# Altium PCB EXP-10.PcbDoc
Units mm, origin at the board's own origin, x right, y up, seen from the top; angles counter-clockwise.
Board outline 152.4 x 136.53 mm, 2 copper layers (Top Layer, Bottom Layer); 66 components, 92 nets, 204 pads, 9 vias.
Unrouted connection lines stored in the file: 8.
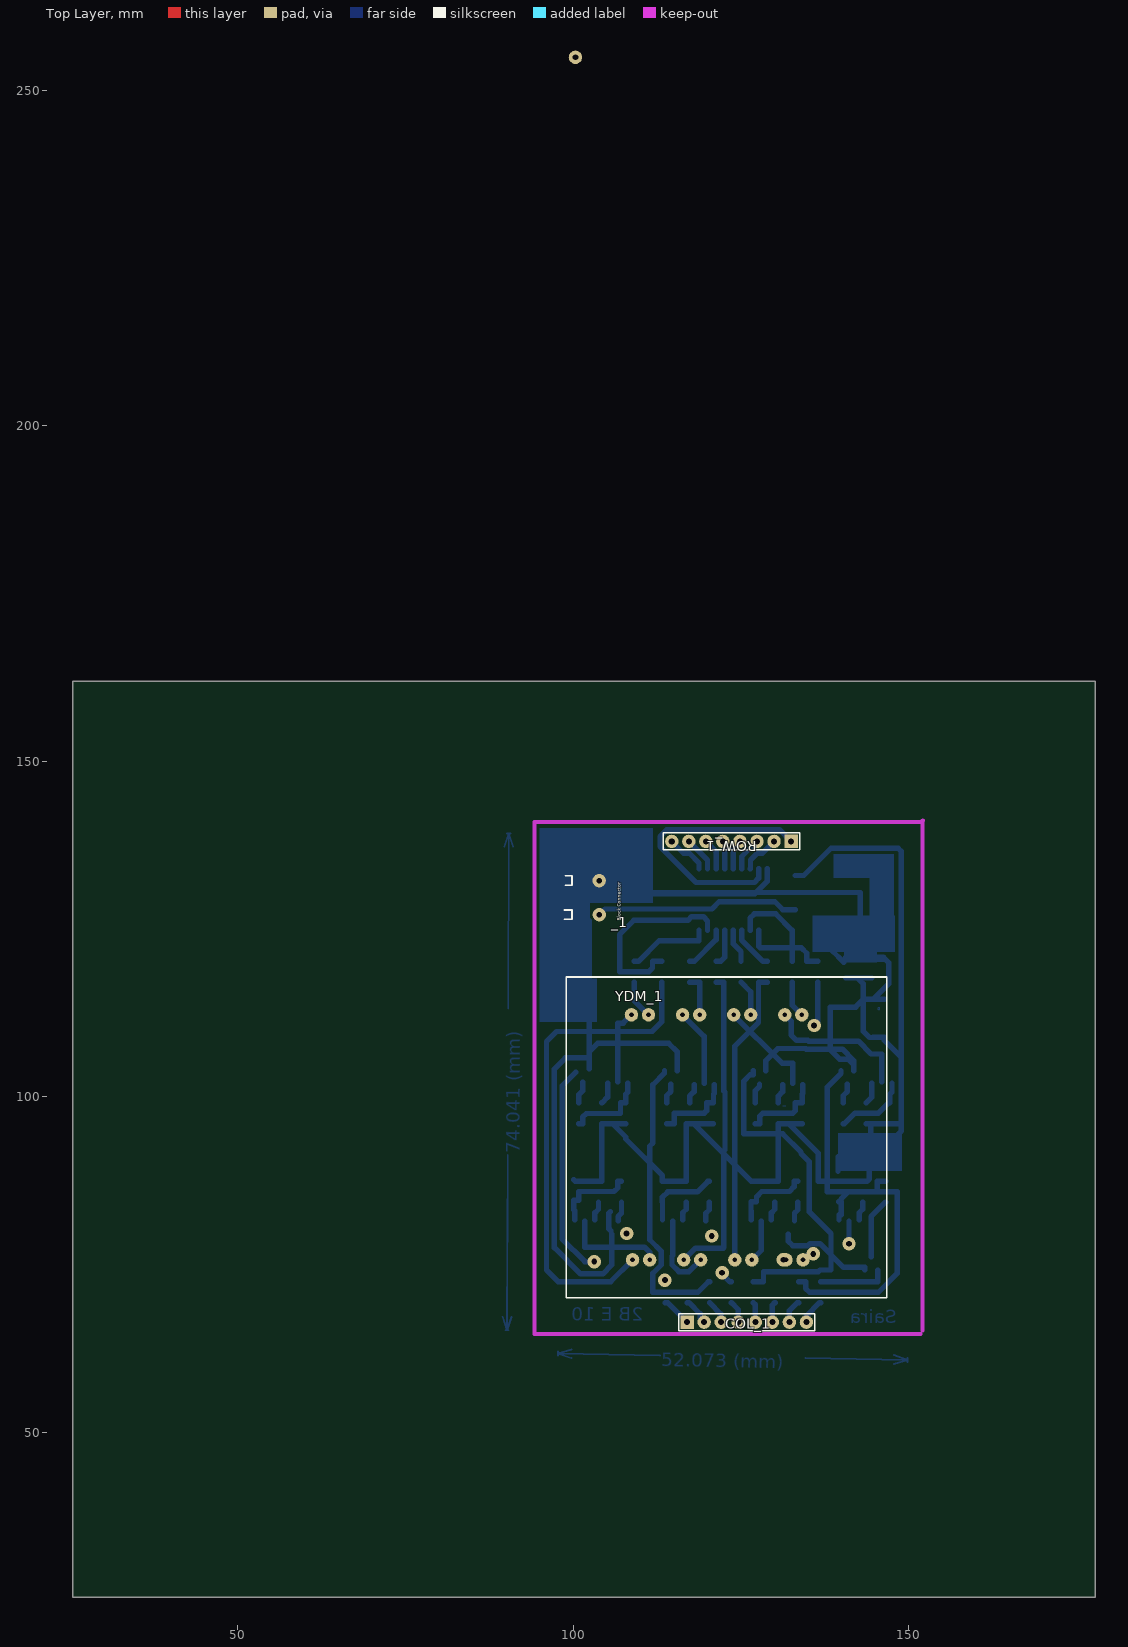
[diagram p0: Top Layer view]
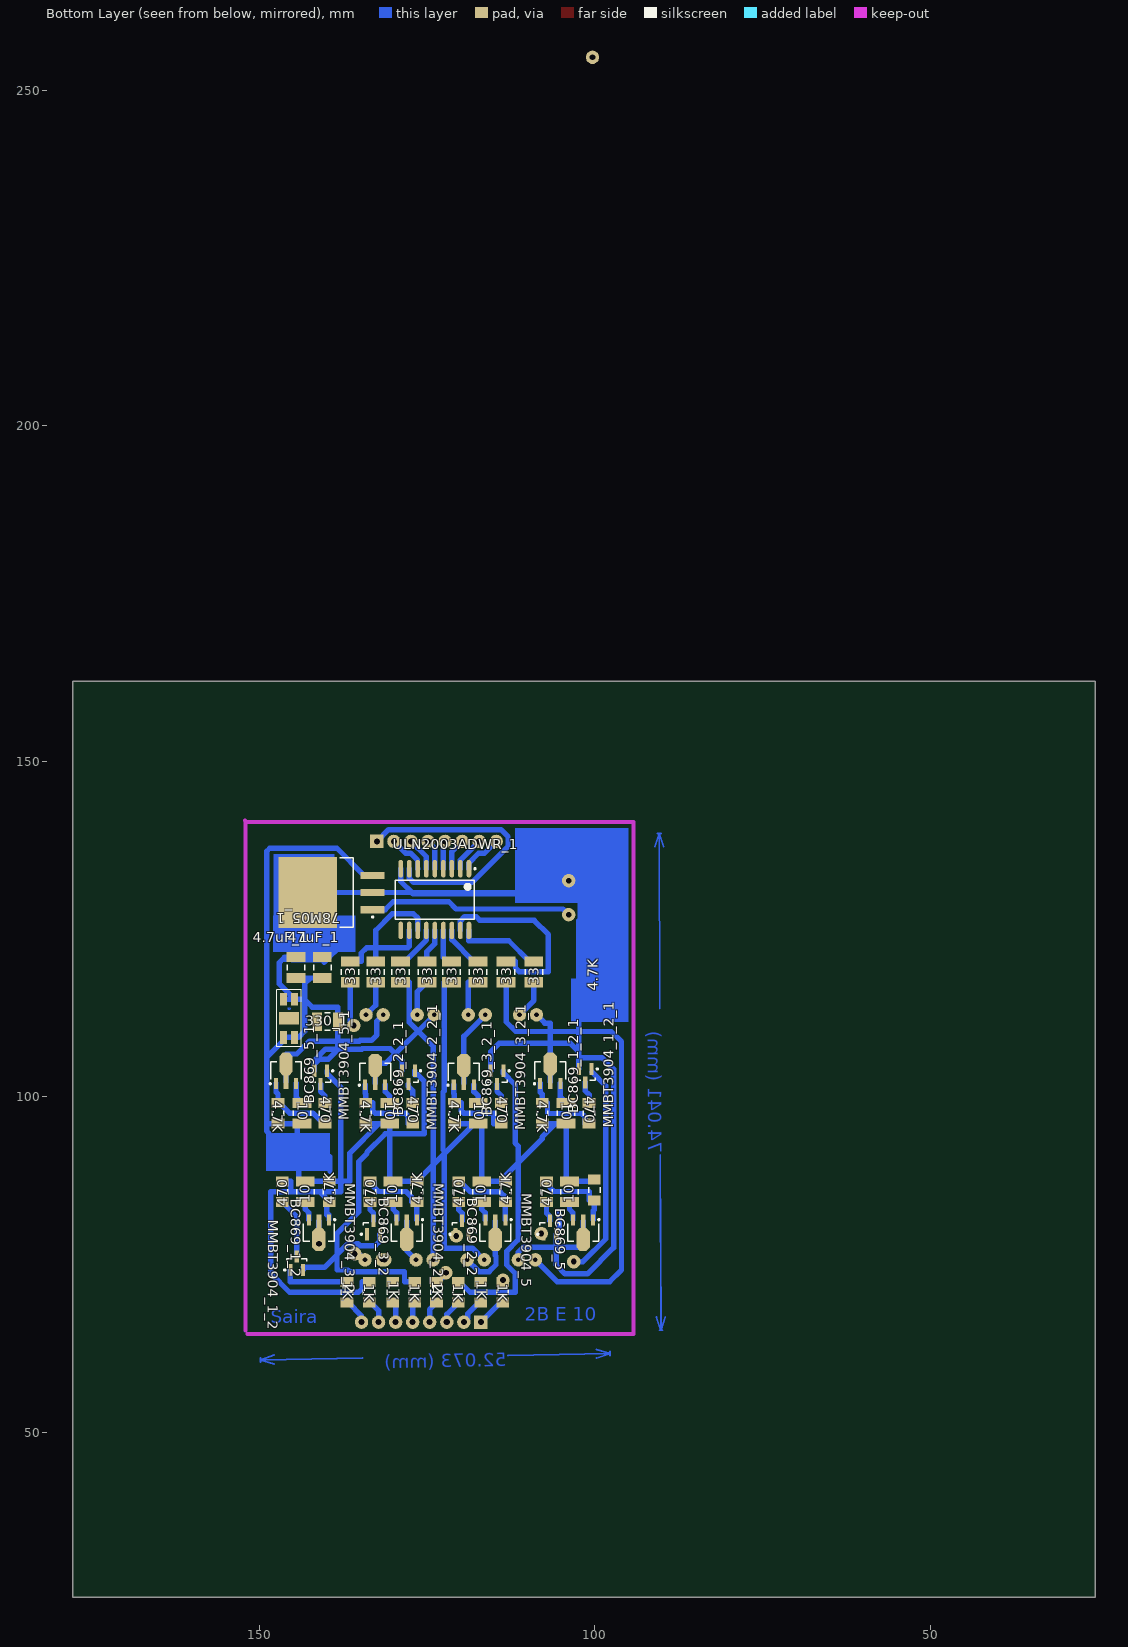
[diagram p1: Bottom Layer view, seen from below]

## Layer stack, top to bottom
Top Solder: solder mask 0.0102, Solder Resist, Dk 3.5
Top Layer: signal copper 0.0356
Dielectric 1: dielectric 0.32, FR-4, Dk 4.8
Bottom Layer: signal copper 0.0356
Bottom Solder: solder mask 0.0102, Solder Resist, Dk 3.5

## Board outline
25.4,25.4 177.8,25.4 177.8,161.925 25.4,161.925

## Design rules (kind name [scope] priority, off if disabled: settings)
Clearance [All] p1: gap=0.35 ignorepadtopadclearanceinfootprint=FALSE
ComponentClearance [All] p1 off: gap=0.254 collisioncheckmode=3 verticalgap=0.254 showdistances=FALSE
PlaneClearance [All] p1: clearance=0.85
PolygonConnect [All] p1: connectstyle=Direct reliefconductorwidth=0.254 reliefentries=4 polygonreliefangle="90 Angle" airgapwidth=0.254
RoutingVias [All] p1: holewidth=0.711 width=1.27 viastyle="Through Hole" minholewidth=0.711 minwidth=1.27 maxholewidth=0.711 maxwidth=1.27
SolderMaskExpansion [All] p1: expansion=0.102 istentingtop=FALSE
Width [All] p1: maxlimit=0.8 minlimit=0.8 preferedwidth=0.8
28 further rules are at their usual default settings.

## Components (designator, comment, footprint, x,y, rotation, side; value= is the part's Value field where it differs from the comment)
1K "Comment" RESC3216M 133.604,70.866 r270 bottom
1K "Comment" RESC3216M 113.713,70.866 r270 bottom
1K "Comment" RESC3216M 126.825,70.866 r270 bottom
1K "Comment" RESC3216M 120.317,70.866 r270 bottom
1K "Comment" RESC3216M 130.08,70.866 r270 bottom
1K "Comment" RESC3216M 123.571,70.866 r270 bottom
1K "Comment" RESC3216M 136.906,70.866 r270 bottom
1K "Comment" RESC3216M 116.967,70.866 r270 bottom
4.7K "Comment" RESC3216M 147.193,97.536 r270 bottom
4.7K "Comment" RESC3216M 107.823,97.536 r270 bottom
4.7K "Comment" RESC3216M 134.112,97.536 r270 bottom
4.7K "Comment" RESC3216M 120.904,97.536 r270 bottom
4.7K "Comment" RESC3216M 126.492,85.878 r90 bottom
4.7K "Comment" RESC3216M 113.284,85.878 r90 bottom
4.7K "Comment" RESC3216M 139.573,85.878 r90 bottom
4.7K "Comment" RESC3216M 100.055,86.106 r90 bottom
4.7uF_1 "Comment" CAPC3225M 144.526,119.253 r90 bottom
10 "Comment" RESC3225M 143.637,97.536 r270 bottom
10 "Comment" RESC3225M 104.267,97.536 r270 bottom
10 "Comment" RESC3225M 130.556,97.536 r270 bottom
10 "Comment" RESC3225M 117.348,97.536 r270 bottom
10 "Comment" RESC3225M 130.048,85.852 r90 bottom
10 "Comment" RESC3225M 116.84,85.852 r90 bottom
10 "Comment" RESC3225M 143.129,85.852 r90 bottom
10 "Comment" RESC3225M 103.759,85.852 r90 bottom
33 "Comment" RESC3225M 109.076,118.618 r90 bottom
33 "Comment" RESC3225M 113.23,118.618 r90 bottom
33 "Comment" RESC3225M 121.322,118.618 r90 bottom
33 "Comment" RESC3225M 117.385,118.618 r90 bottom
33 "Comment" RESC3225M 128.942,118.618 r90 bottom
33 "Comment" RESC3225M 125.005,118.618 r90 bottom
33 "Comment" RESC3225M 136.435,118.618 r90 bottom
33 "Comment" RESC3225M 132.625,118.618 r90 bottom
47uF_1 "Comment" CAPC3225M 140.589,119.253 r90 bottom
78M05_1 "Comment" TO254P1420-4M 139.198,130.429 r0 bottom
330_1 "Comment" RESC3225M 139.827,111.187 r180 bottom
470 "Comment" RESC3216M 140.208,97.536 r270 bottom
470 "Comment" RESC3216M 100.838,97.536 r270 bottom
470 "Comment" RESC3216M 127.127,97.536 r270 bottom
470 "Comment" RESC3216M 113.919,97.536 r270 bottom
470 "Comment" RESC3216M 133.477,85.852 r90 bottom
470 "Comment" RESC3216M 120.269,85.852 r90 bottom
470 "Comment" RESC3216M 146.558,85.852 r90 bottom
470 "Comment" RESC3216M 107.188,85.852 r90 bottom
_1 "Comment" "PCB Block Connector" 103.632,129.667 r90 top
BC869_1_2 "Comment" SOT89M 141.097,79.74 r270 bottom
BC869_1_2_1 "Comment" SOT89M 106.627,103.89 r90 bottom
BC869_2_2 "Comment" SOT89M 114.808,79.74 r270 bottom
BC869_2_2_1 "Comment" SOT89M 132.715,103.681 r90 bottom
BC869_3_2 "Comment" SOT89M 128.016,79.74 r270 bottom
BC869_3_2_1 "Comment" SOT89M 119.507,103.681 r90 bottom
BC869_5 "Comment" SOT89M 101.727,79.74 r270 bottom
BC869_5_1 "Comment" SOT89M 145.997,103.89 r90 bottom
COL_1 "Comment" HDR1X8 116.967,66.421 r0 top
MMBT3904_1_2 "Comment" SOT23-3M 144.399,75.184 r90 bottom
MMBT3904_1_2_1 "Comment" SOT23-3M 101.412,103.14 r270 bottom
MMBT3904_2_2 "Comment" SOT23-3M 119.761,80.518 r90 bottom
MMBT3904_2_2_1 "Comment" SOT23-3M 127.762,102.87 r270 bottom
MMBT3904_3_2 "Comment" SOT23-3M 132.969,80.518 r90 bottom
MMBT3904_3_2_1 "Comment" SOT23-3M 114.554,102.87 r270 bottom
MMBT3904_5 "Comment" SOT23-3M 106.68,80.518 r90 bottom
MMBT3904_5_1 "Comment" SOT23-3M 140.843,102.87 r270 bottom
ROW_1 "Comment" HDR1X8 132.461,138.049 r180 top
ULN2003ADWR_1 "Comment" SOIC127P1030-18M 123.825,129.385 r270 bottom
YDM_1 "Comment" "Yellow or Green Dot Matrix DIsplay" 122.725,93.954 r0 top net-tie
? "Comment" SMD-LED 145.542,111.695 r90 bottom

## Footprints (in the part's own frame and the unit in brackets; to place one, negate y for a bottom-side part, rotate by r counter-clockwise, add the part's x,y. Pads: shape width x height; smd on the part's side, far side on the other; paste and mask are expansions set on the pad)
CAPC3225M [mm] "Chip Capacitor, Body 3.2x2.5mm, IPC Low Density"
  rect 1.5x2.8 smd: 1(-1.55,0) 2(1.55,0)
  silkscreen extent -0.4,-1.3 0.4,1.3, body extent -1.7,-1.35 1.7,1.35, height 1.35
HDR1X8 [mm] "Connector; Header; 8 Position"
  rect 2x2 hole 0.9: 1(0,0)
  round 2 hole 0.9: 2(2.54,0) 3(5.08,0) 4(7.62,0) 5(10.16,0) 6(12.7,0) 7(15.24,0) 8(17.78,0)
  silkscreen extent -1.27,-1.27 19.05,1.27
"PCB Block Connector" [mm]
  round 2 hole 0.85: 1(-2.54,-0.254) 2(2.54,-0.24)
  silkscreen extent -3.22,3.82 3.26,4.96, body extent -5,-5.45 5.03,4.96, height 5.08
RESC3216M [mm] "Chip Resistor, Body 3.2x1.6mm, IPC Low Density"
  rect 1.5x1.9 smd: 1(-1.55,0) 2(1.55,0)
  silkscreen extent -0.4,-0.85 0.4,0.85, body extent -1.68,-0.87 1.68,0.87, height 0.71
RESC3225M [mm] "Chip Resistor, Body 3.2x2.5mm, IPC Low Density"
  rect 1.5x2.8 smd: 1(-1.55,0) 2(1.55,0)
  silkscreen extent -0.4,-1.3 0.4,1.3, body extent -1.68,-1.32 1.68,1.32, height 0.71
SMD-LED [mm] "SMD LED PCB"
  rect 1.9x1 smd: 1(-2.85,0.82) 2(-2.85,-0.82) 3(2.85,-0.82) 4(2.85,0.82)
  rect 1.8x3 smd: 5(0,0)
  Top Layer circle w0.154: c1.441,-0.01 r0.149
  silkscreen extent -4.25,-1.84 4.25,1.82
SOIC127P1030-18M [mm] "SOIC, 18-Leads, Body 11.6x7.5mm, Pitch 1.27mm, IPC Low Density"
  oval 2.6x0.7 smd: 1(-4.6,5.08) 2(-4.6,3.81) 3(-4.6,2.54) 4(-4.6,1.27) 5(-4.6,0) 6(-4.6,-1.27) 7(-4.6,-2.54) 8(-4.6,-3.81) 9(-4.6,-5.08) 10(4.6,-5.08) 11(4.6,-3.81) 12(4.6,-2.54) 13(4.6,-1.27) 14(4.6,0) 15(4.6,1.27) 16(4.6,2.54) 17(4.6,3.81) 18(4.6,5.08)
  silkscreen extent -4.72,-5.9 2.9,6.1, body extent -3.8,-5.95 3.8,5.95, height 2.65
SOT23-3M [mm] "SOT23, 3-Leads, Body 2.9x1.3mm, Pitch 0.95mm, Lead Span 2.5mm, IPC Low Density"
  rect 1.8x0.6 smd: b(-1,0.95) c(1,0) e(-1,-0.95)
  silkscreen extent -1.12,-1.5 0.7,1.93, body extent -0.7,-1.5 0.7,1.5, height 1.1
SOT89M [mm] "SOT89, 3-Leads, Body 4.5x2.4 mm, Pitch 1.5mm, Lead Span 4.1mm, IPC Low Density"
  rect 1.6x0.6 smd: b(-1.9,1.5) e(-1.9,-1.5)
  rect 2x0.7 smd: c(-1.7,0)
  oct 3.4x2 smd: c(1,0)
  silkscreen extent -2.07,-2.3 1.3,2.47, body extent -1.3,-2.3 1.3,2.3, height 1.6
TO254P1420-4M [mm] "D2-PAK, 4-Leads, Body 8.9x10.1mm, Pitch 2.54mm, Lead Span 14.2mm, IPC Low Density"
  rect 8.7x10.55 smd: C(3.55,0)
  rect 3.6x1.1 smd: GND(-6.1,0) input(-6.1,2.54) OUT(-6.1,-2.54)
  silkscreen extent -6.22,-5.2 -1.2,5.2, body extent -3.25,-5.2 6.15,5.2, height 4.65
"Yellow or Green Dot Matrix DIsplay" [mm] "Y or G Dot Matrix"
  round 2 hole 0.7: 3(-13.886,-18.262) 4(-11.346,-18.262) 6(-6.266,-18.262) 7(-3.726,-18.262) 9(1.354,-18.262) 10(3.894,-18.262) 12(8.974,-18.262) 13(11.514,-18.262) 20(11.346,18.262) 21(8.806,18.262) 23(3.726,18.262) 24(1.186,18.262) 26(-3.894,18.262) 27(-6.434,18.262) 29(-11.514,18.262) 30(-14.054,18.262)
  silkscreen extent -23.78,-23.9 23.99,23.89

## Free pads (board coordinates)
  round 2 hole 0.85: 2(100.33,254.889)

## Via types
v1: diameter 2, hole 0.85, Top Layer to Bottom Layer, 9 vias

## Nets (pads, with @x,y where several pads share a name; then routed paths per layer and width w, separated by ;. In a path a pad name is that pad's centre, name@x,y a point inside that pad or via, vN(x,y) a via of type N, cw(c..) or ccw(c..) an arc to the next point about the centre after c; other vN are vias at no path point)
1: 33.1@113.231,117.068 YDM_1.3 | length 73.3
  Bottom Layer w0.8: YDM_1.3 105.588,72.441 97.757,72.441 96.012,74.186 96.012,108.204 97.536,109.728 111.76,109.728 113.182,111.15 113.182,117.068 33.1@113.231,117.068
2: BC869_5.c YDM_1.4 | length 15
  Bottom Layer w0.8: BC869_5.c@101.727,81.44 101.727,78.74 101.727,77.597 110.617,77.597 111.379,76.835 YDM_1.4
3: 33.1@121.322,117.068 YDM_1.6 | length 47.5
  Bottom Layer w0.8: YDM_1.6 118.212,77.445 122.326,77.445 122.428,77.546 122.428,91.948 122.606,92.126 122.606,100.686 122.403,100.889 122.403,117.068 33.1@121.322,117.068
4: BC869_2_2.c YDM_1.7 | length 12
  Bottom Layer w0.8: BC869_2_2.c@114.808,81.44 114.808,78.74 114.808,76.375 114.709,76.276 114.709,74.967 115.734,73.942 117.249,73.942 YDM_1.7
5: 33.1@128.942,117.068 YDM_1.9 | length 44.2
  Bottom Layer w0.8: YDM_1.9 124.079,107.544 127.61,111.074 127.61,117.068 33.1@128.942,117.068
6: BC869_3_2.c YDM_1.10 | length 6.3
  Bottom Layer w0.8: YDM_1.10 128.016,77.089 128.016,78.74 BC869_3_2.c@128.016,81.44
7: 33.1@136.435,117.068 YDM_1.12 | length 6.7
  Bottom Layer w0.8: v1(135.89,110.617) 136.435,111.162 33.1@136.435,117.068
  other v1: 131.318,75.692
8: BC869_1_2.c YDM_1.13 | length 5.2
  Bottom Layer w0.8: YDM_1.13 135.128,76.581 v1(135.763,76.581) ; v1(141.097,78.105) 141.097,78.74 BC869_1_2.c@141.097,81.44
9: 33.1@132.625,117.068 YDM_1.20 | length 5.5
  Bottom Layer w0.8: 33.1@132.625,117.068 132.625,113.663 YDM_1.20
10: BC869_5_1.c YDM_1.21 | length 22.3
  Bottom Layer w0.8: YDM_1.21 132.461,111.287 132.461,109.22 133.274,108.407 134.95,108.407 135.077,108.28 142.494,108.28 144.399,106.375 145.997,106.375 145.997,104.89 BC869_5_1.c@145.997,102.19
11: 33.1@125.005,117.068 YDM_1.23 | length 5.5
  Bottom Layer w0.8: 33.1@125.005,117.068 126.452,115.621 YDM_1.23
12: BC869_2_2_1.c YDM_1.24 | length 14.8
  Bottom Layer w0.8: YDM_1.24 131.124,105.004 132.715,105.004 132.715,104.681 BC869_2_2_1.c@132.715,101.981
13: 33.1@117.385,117.068 YDM_1.26 | length 6.3
  Bottom Layer w0.8: 33.1@117.385,117.068 118.832,117.068 YDM_1.26
14: BC869_3_2_1.c YDM_1.27 | length 11.6
  Bottom Layer w0.8: YDM_1.27 119.507,109.001 119.507,104.681 BC869_3_2_1.c@119.507,101.981
15: 33.1@109.076,117.068 YDM_1.29 | length 5.7
  Bottom Layer w0.8: 33.1@109.076,117.068 109.076,114.352 YDM_1.29
16: BC869_1_2_1.c YDM_1.30 | length 11.3
  Bottom Layer w0.8: BC869_1_2_1.c@106.627,102.19 106.627,104.89 106.627,110.973 107.429,110.973 YDM_1.30
_1: 33.2@113.231,120.168 ULN2003ADWR_1.17 | length 29
  Bottom Layer w0.8: 33.2@113.231,120.168 111.811,120.168 111.811,119.202 111.227,118.618 106.909,118.618 106.909,124.181 109.017,126.289 117.107,126.289 117.653,126.835 119.38,126.835 120.015,126.2 ULN2003ADWR_1.17
_3: 33.2@121.322,120.168 ULN2003ADWR_1.15 | length 5.5
  Bottom Layer w0.8: 33.2@121.322,120.168 121.972,120.168 122.555,120.751 ULN2003ADWR_1.15
_5: 33.2@128.942,120.168 ULN2003ADWR_1.13 | length 6.6
  Bottom Layer w0.8: ULN2003ADWR_1.13 125.095,123.365 128.292,120.168 33.2@128.942,120.168
_7: 33.2@136.435,120.168 ULN2003ADWR_1.11 | length 12.8
  Bottom Layer w0.8: ULN2003ADWR_1.11 127.635,122.451 127.887,122.199 133.985,122.199 134.798,121.387 134.798,120.168 33.2@136.435,120.168
_9: 33.2@132.625,120.168 ULN2003ADWR_1.12 | length 14
  Bottom Layer w0.8: ULN2003ADWR_1.12 126.365,126.619 127,127.254 130.175,127.254 132.625,124.804 33.2@132.625,120.168
_11: 33.2@125.005,120.168 ULN2003ADWR_1.14 | length 5.1
  Bottom Layer w0.8: ULN2003ADWR_1.14 123.825,122.812 125.005,121.632 33.2@125.005,120.168
_13: 33.2@117.385,120.168 ULN2003ADWR_1.16 | length 6.6
  Bottom Layer w0.8: 33.2@117.385,120.168 118.035,120.168 121.285,123.418 ULN2003ADWR_1.16
_15: 33.2@109.076,120.168 ULN2003ADWR_1.18 | length 12.5
  Bottom Layer w0.8: 33.2@109.076,120.168 109.726,120.168 112.808,123.25 118.745,123.25 ULN2003ADWR_1.18
D1: ROW_1.7 ULN2003ADWR_1.2 | length 5.2
  Bottom Layer w0.8: ROW_1.7 120.015,135.255 ULN2003ADWR_1.2
D2: 1K.2@116.967,69.316 COL_1.2 | length 4.1
  Bottom Layer w0.8: 1K.2@116.967,69.316 117.254,69.316 118.929,67.641 118.929,66.999 COL_1.2
D3: ROW_1.5 ULN2003ADWR_1.4 | length 4.2
  Bottom Layer w0.8: ROW_1.5 122.555,137.795 ULN2003ADWR_1.4
D4: 1K.2@123.571,69.316 COL_1.4 | length 3.3
  Bottom Layer w0.8: 1K.2@123.571,69.316 124.587,68.3 COL_1.4
D5: ROW_1.3 ULN2003ADWR_1.6 | length 5
  Bottom Layer w0.8: ULN2003ADWR_1.6 125.095,135.763 ROW_1.3
D6: 1K.2@130.079,69.316 COL_1.6 | length 3.1
  Bottom Layer w0.8: COL_1.6 129.667,68.966 130.017,69.316 1K.2@130.079,69.316
D7: ROW_1.1 ULN2003ADWR_1.8 | length 40.8
  Bottom Layer w0.8: ULN2003ADWR_1.8 127.635,132.57 127,131.935 118.289,131.935 112.931,137.293 112.931,138.774 113.956,139.799 130.711,139.799 ROW_1.1
D8: 1K.2@136.906,69.316 COL_1.8 | length 3.9
  Bottom Layer w0.8: COL_1.8 134.747,67.357 136.706,69.316 1K.2@136.906,69.316
D9: ROW_1.2 ULN2003ADWR_1.7 | length 6
  Bottom Layer w0.8: ULN2003ADWR_1.7 126.415,134.035 126.415,135.271 127.443,136.299 128.171,136.299 ROW_1.2
D10: 1K.2@133.604,69.316 COL_1.7 | length 3.6
  Bottom Layer w0.8: COL_1.7 132.207,68.119 133.404,69.316 1K.2@133.604,69.316
D11: ROW_1.4 ULN2003ADWR_1.5 | length 4.5
  Bottom Layer w0.8: ULN2003ADWR_1.5 123.825,137.033 ROW_1.4
D12: 1K.2@126.825,69.316 COL_1.5 | length 3
  Bottom Layer w0.8: 1K.2@126.825,69.316 127.127,69.014 COL_1.5
D13: ROW_1.6 ULN2003ADWR_1.3 | length 4.7
  Bottom Layer w0.8: ROW_1.6 121.285,136.525 ULN2003ADWR_1.3
D14: 1K.2@120.317,69.316 COL_1.3 | length 3.6
  Bottom Layer w0.8: 1K.2@120.317,69.316 122.047,67.586 COL_1.3
D15: ROW_1.8 ULN2003ADWR_1.1 | length 6.2
  Bottom Layer w0.8: ROW_1.8 116.443,136.287 117.293,136.287 118.745,134.835 ULN2003ADWR_1.1
D16: 1K.2@113.713,69.316 COL_1.1 | length 4.5
  Bottom Layer w0.8: 1K.2@113.713,69.316 114.072,69.316 COL_1.1
GND: 4.7uF_1.2 47uF_1.2 78M05_1.C 78M05_1.GND 330_1.2 ?.3 ?.4 _1.2 MMBT3904_1_2.e MMBT3904_1_2_1.e MMBT3904_2_2.e MMBT3904_2_2_1.e MMBT3904_3_2.e MMBT3904_3_2_1.e MMBT3904_5.e MMBT3904_5_1.e ULN2003ADWR_1.9 | length 256.5
  Bottom Layer w0.8: 96.52,128.905 99.822,132.207 _1.2 ; MMBT3904_1_2_1.e 102.362,105.791 ; 105.554,82.887 105.303,82.635 105.303,80.345 MMBT3904_5.e@105.63,80.018 ; MMBT3904_5.e 105.73,74.93 104.409,73.609 101.092,73.609 97.18,77.521 97.18,104.14 98.831,105.791 102.362,105.791 ; MMBT3904_3_2_1.e 115.504,106.68 114.234,107.95 103.632,107.95 102.362,106.68 ; MMBT3904_2_2_1.e 128.712,105.41 130.49,107.188 134.62,107.188 134.722,107.086 138.277,107.086 ; ULN2003ADWR_1.9 128.905,132.08 127.254,130.429 ; MMBT3904_3_2.e 132.019,78.496 132.715,77.8 134.976,77.8 135.28,78.105 136.754,78.105 140.284,74.574 143.449,74.574 MMBT3904_1_2.e ; 140.335,120.015 139.743,120.607 139.743,120.635 139.589,120.789 139.561,120.789 138.303,122.047 ; 47uF_1.2 142.748,120.803 ; MMBT3904_5_1.e 141.793,104.79 ; ?.4 146.362,114.529 144.722,114.529 ?.3 ?.3@144.722,114.554 ; 102.362,105.791 102.362,106.68 ; 102.362,106.68 102.362,126.263 102.133,126.492 102.133,130.468 _1.2 ; _1.2 105.65,130.429 ; 105.65,130.429 127.254,130.429 ; 105.65,130.429 105.853,130.226 127.051,130.226 127.254,130.429 ; 127.254,130.429 78M05_1.GND 78M05_1.C 142.748,120.803 ; 138.277,107.086 330_1.2 138.277,113.36 142.088,113.36 143.281,114.554 ?.3@144.722,114.554 ; 138.277,107.086 138.277,107.036 139.7,105.613 140.97,105.613 141.793,104.79 ; 138.277,107.086 140.117,107.086 141.793,105.41 141.793,104.79 ; 138.303,122.047 137.179,123.171 137.179,123.717 137.922,124.46 138.201,124.46 138.303,124.358 138.303,122.047 ; 142.748,120.803 4.7uF_1.2 ; 4.7uF_1.2 144.812,120.517 146.487,120.517 ; 4.7uF_1.2 146.202,120.803 146.487,120.517 ; ?.3@144.722,114.554 146.99,116.822 146.99,120.015 146.487,120.517
Input: 78M05_1.input _1.1 | length 30.5
  Bottom Layer w0.8: _1.1 104.744,127.985 120.67,127.985 121.742,129.057 130.048,129.057 131.216,127.889 78M05_1.input
LED_R: 
N2b: 1K.1@116.967,72.416 MMBT3904_5.b
  other v1: 107.95,79.629
N2c: 470.1@107.188,84.302 MMBT3904_5.c | length 3
  Bottom Layer w0.8: MMBT3904_5.c 106.68,82.161 107.188,82.669 470.1@107.188,84.302
N2e: 
N4b: 1K.1@123.571,72.416 MMBT3904_2_2.b | length 2.1
  Bottom Layer w0.8: v1(122.174,73.787) 122.174,73.613 123.371,72.416 1K.1@123.571,72.416
  other v1: 120.65,79.248
N4c: 470.1@120.269,84.302 MMBT3904_2_2.c | length 3
  Bottom Layer w0.8: MMBT3904_2_2.c 119.761,82.652 120.269,83.16 470.1@120.269,84.302
N4e: 
N6b: 1K.1@130.079,72.416 MMBT3904_3_2.b
N6c: 470.1@133.477,84.302 MMBT3904_3_2.c | length 3
  Bottom Layer w0.8: MMBT3904_3_2.c 132.969,82.652 133.477,83.16 470.1@133.477,84.302
N6e: 
N8b: 1K.1@136.906,72.416 MMBT3904_1_2.b | length 10.2
  Bottom Layer w0.8: 1K.1@136.906,72.416 145.349,72.416 MMBT3904_1_2.b
N8c: 470.1@146.558,84.302 MMBT3904_1_2.c | length 9
  Bottom Layer w0.8: MMBT3904_1_2.c 144.399,82.143 470.1@146.558,84.302
N8e: 
N10b: 1K.1@133.604,72.416 MMBT3904_5_1.b | length 58.4
  Bottom Layer w0.8: 1K.1@133.604,72.416 134.62,72.416 134.62,71.45 135.204,70.866 145.466,70.866 148.26,73.66 148.26,85.827 141.097,85.827 141.072,85.852 137.871,85.852 137.871,101.458 139.893,103.48 MMBT3904_5_1.b
N10c: 470.1@140.208,99.086 MMBT3904_5_1.c | length 3
  Bottom Layer w0.8: 470.1@140.208,99.086 140.208,100.152 140.843,100.787 MMBT3904_5_1.c
N10e: 
N12b: 1K.1@126.825,72.416 MMBT3904_2_2_1.b | length 52.5
  Bottom Layer w0.8: MMBT3904_2_2_1.b 126.812,103.276 126.365,103.276 125.425,102.337 125.425,94.463 131.216,94.463 133.935,91.744 133.935,91.54 135.179,90.297 135.179,82.829 138.405,79.604 138.405,74.193 136.779,74.193 136.525,73.939 128.346,73.939 128.346,72.416 1K.1@126.825,72.416
N12c: 470.1@127.127,99.086 MMBT3904_2_2_1.c | length 3
  Bottom Layer w0.8: 470.1@127.127,99.086 127.127,100.901 127.762,101.536 MMBT3904_2_2_1.c
N12e: 
N14b: 1K.1@120.317,72.416 MMBT3904_3_2_1.b | length 44.3
  Bottom Layer w0.8: MMBT3904_3_2_1.b 113.604,103.53 111.862,101.788 111.862,93.116 111.404,92.659 111.404,78.689 113.129,76.965 113.129,74.967 111.862,73.7 111.862,70.866 118.567,70.866 120.117,72.416 1K.1@120.317,72.416
N14c: 470.1@113.919,99.086 MMBT3904_3_2_1.c | length 3
  Bottom Layer w0.8: 470.1@113.919,99.086 113.919,100.152 114.554,100.787 MMBT3904_3_2_1.c
N14e: 
N16b: 1K.1@113.713,72.416 MMBT3904_1_2_1.b | length 32.4
  Bottom Layer w0.8: MMBT3904_1_2_1.b@100.362,103.64 98.355,101.633 98.355,78.824 101.741,75.438 v1(103.124,75.438) ; v1(113.665,72.688) 113.665,72.604 113.477,72.416 1K.1@113.713,72.416
N16c: 470.1@100.838,99.086 MMBT3904_1_2_1.c | length 3.3
  Bottom Layer w0.8: 470.1@100.838,99.086 100.838,100.305 101.412,100.879 MMBT3904_1_2_1.c
N16e: 
P2b: 4.7K.1@100.055,84.556 470.2@107.188,87.402 BC869_5.b | length 12.6
  Bottom Layer w0.8: BC869_5.b 100.227,83.007 100.055,83.179 100.055,84.556 100.838,84.556 100.838,85.877 106.07,85.877 106.638,86.445 106.638,87.402 470.2@107.188,87.402
P2c: 
P2e: 10.1@103.759,84.302 BC869_5.e | length 2.9
  Bottom Layer w0.8: BC869_5.e 103.227,82.702 103.759,83.234 10.1@103.759,84.302
P4b: 4.7K.1@113.284,84.328 470.2@120.269,87.402 BC869_2_2.b | length 12.1
  Bottom Layer w0.8: 4.7K.1@113.284,84.328 113.284,85.014 4.7K.1@113.308,85.038 ; BC869_2_2.b 113.308,84.328 4.7K.1@113.308,85.038 ; 470.2@120.269,87.402 120.066,87.402 118.49,85.827 114.097,85.827 4.7K.1@113.308,85.038
P4c: 
P4e: 10.1@116.84,84.302 BC869_2_2.e | length 2.9
  Bottom Layer w0.8: BC869_2_2.e 116.308,82.702 116.84,83.234 10.1@116.84,84.302
P6b: 4.7K.1@126.492,84.328 470.2@133.477,87.402 BC869_3_2.b | length 11.9
  Bottom Layer w0.8: BC869_3_2.b 126.516,82.956 126.492,82.98 126.492,84.328 127.305,84.328 127.305,85.09 128.092,85.877 132.207,85.877 132.927,86.597 132.927,87.402 470.2@133.477,87.402
P6c: 
P6e: 10.1@130.048,84.302 BC869_3_2.e | length 2.9
  Bottom Layer w0.8: BC869_3_2.e 129.516,82.702 130.048,83.234 10.1@130.048,84.302
P8b: 4.7K.1@139.573,84.328 470.2@146.558,87.402 BC869_1_2.b | length 12.4
  Bottom Layer w0.8: 4.7K.1@139.573,84.328 4.7K.1@139.903,84.328 ; BC869_1_2.b 139.597,82.43 139.911,82.43 139.911,84.328 4.7K.1@139.903,84.328 ; 470.2@146.558,87.402 145.288,87.402 145.288,85.827 140.97,85.827 139.903,84.76 4.7K.1@139.903,84.328
P8c: 
P8e: 10.1@143.129,84.302 BC869_1_2.e | length 2.9
  Bottom Layer w0.8: BC869_1_2.e 142.597,82.702 143.129,83.234 10.1@143.129,84.302
P10b: 4.7K.1@147.193,99.086 470.2@140.208,95.986 BC869_5_1.b | length 11.3
  Bottom Layer w0.8: 470.2@140.208,95.986 140.411,95.986 141.987,97.561 145.465,97.561 146.99,99.086 147.193,99.086 147.193,100.381 147.497,100.685 BC869_5_1.b
P10c: 
P10e: 10.1@143.637,99.086 BC869_5_1.e | length 3.3
  Bottom Layer w0.8: 10.1@143.637,99.086 144.497,99.946 BC869_5_1.e
P12b: 4.7K.1@134.112,99.086 470.2@127.127,95.986 BC869_2_2_1.b | length 12.4
  Bottom Layer w0.8: 470.2@127.127,95.986 127.819,95.986 127.819,97.136 128.245,97.561 132.715,97.561 133.096,97.942 133.096,99.086 134.112,99.086 134.112,100.381 134.215,100.484 BC869_2_2_1.b
P12c: 
P12e: 10.1@130.556,99.086 BC869_2_2_1.e | length 3
  Bottom Layer w0.8: 10.1@130.556,99.086 130.556,100.101 131.215,100.76 BC869_2_2_1.e
P14b: 4.7K.1@120.904,99.086 470.2@113.919,95.986 BC869_3_2_1.b | length 12.6
  Bottom Layer w0.8: 470.2@113.919,95.986 115.037,95.986 115.037,97.561 119.507,97.561 119.888,97.942 119.888,99.086 120.904,99.086 120.904,100.381 121.007,100.484 BC869_3_2_1.b
P14c: 
P14e: 10.1@117.348,99.086 BC869_3_2_1.e | length 3
  Bottom Layer w0.8: 10.1@117.348,99.086 117.348,100.101 118.007,100.76 BC869_3_2_1.e
P16b: 4.7K.1@107.823,99.086 470.2@100.838,95.986 BC869_1_2_1.b | length 12.8
  Bottom Layer w0.8: 470.2@100.838,95.986 101.397,95.986 101.397,96.952 101.956,97.511 107.036,97.511 107.036,99.086 107.823,99.086 107.823,100.381 108.127,100.685 BC869_1_2_1.b
P16c: 
P16e: 10.1@104.267,99.086 BC869_1_2_1.e | length 3.3
  Bottom Layer w0.8: 10.1@104.267,99.086 105.127,99.946 BC869_1_2_1.e
VCC: 4.7K.2 4.7uF_1.1 10.2 47uF_1.1 78M05_1.OUT ?.1 ?.2 | length 198.8
  Bottom Layer w0.8: 4.7K.2@100.055,87.656 100.309,87.402 103.759,87.402 104.267,87.402 104.267,95.986 105.817,95.986 ; 4.7K.2@107.823,95.986 105.817,95.986 ; 4.7K.2@120.904,95.986 10.2@117.934,95.986 ; 78M05_1.OUT 134.348,132.969 138.412,137.033 148.424,137.033 148.893,136.564 148.893,105.863 ; 4.7K.2@134.112,95.986 132.106,95.986 ; 139.446,88.9 139.446,91.059 142.57,91.059 144.348,92.837 10.2@144.348,95.986 ; 4.7K.2@139.573,87.428 143.103,87.428 10.2@143.129,87.402 ; 47uF_1.1 142.24,117.703 142.342,117.703 ; 10.2@143.637,95.986 10.2@144.348,95.986 ; 4.7uF_1.1 142.342,117.703 ; 105.817,95.986 107.823,93.98 107.823,93.726 113.284,88.265 113.284,87.428 113.31,87.402 116.84,87.402 116.84,95.986 117.348,95.986 10.2@117.934,95.986 ; 10.2@117.934,95.986 126.492,87.428 128.245,87.428 128.271,87.402 130.048,87.402 130.556,87.402 130.556,95.986 132.106,95.986 ; 132.106,95.986 136.525,91.567 136.525,87.402 10.2@143.129,87.402 ; 142.342,117.703 143.205,116.84 143.205,109.779 144.145,108.839 144.722,108.839 ?.2 ?.1 146.362,108.394 148.893,105.863 ; 10.2@143.129,87.402 143.779,87.402 144.129,87.752 144.129,90.162 148.893,94.926 148.893,95.986 ; 10.2@144.348,95.986 147.193,95.986 148.893,95.986 ; 148.893,95.986 148.893,105.863
pads on no net: 330_1.1 ?.5 ULN2003ADWR_1.10
copper on no net: | length 101.7
  Bottom Layer w0.254: 89.474,67.201 90.133,65.198 ; 89.714,137.242 90.387,139.239 ; 89.879,65.199 90.387,65.198 ; 90.133,139.24 90.641,139.239 ; 90.223,91.335 90.133,65.198 ; 90.298,113.103 90.387,139.239 ; 90.807,67.196 90.133,65.198 ; 91.047,137.237 90.387,139.239
  Bottom Layer w0.3: 97.714,61.441 97.725,62.041 ; 99.707,61.038 97.72,61.741 ; 99.731,62.371 97.72,61.741 ; 112.903,61.468 97.72,61.741 ; 134.601,61.078 149.785,60.806 ; 147.773,60.175 149.785,60.806 ; 147.797,61.508 149.785,60.806 ; 149.779,60.506 149.79,61.106

## Keep-outs
Keep-Out Layer:
  lines w0.254: 152.019,65.151 152.146,65.024
  lines w0.6: 151.765,64.643 94.234,64.643 94.234,140.97 151.892,140.97 152.082,141.16 ; 152.019,65.151 152.019,140.97

## Other copper
Bottom Layer:
  rectangle net GND: 94.996,111.125 103.505,117.602
  rectangle net GND: 94.996,117.221 102.489,129.286
  rectangle net GND: 94.996,128.905 111.887,140.081
  rectangle net VCC: 139.446,88.9 148.971,94.615
  rectangle net VCC: 139.446,91.059 148.59,94.615
  rectangle net P12e: 131.191,98.552 131.699,98.679
  rectangle net GND: 140.335,120.015 145.288,126.492
  rectangle net GND: 138.811,132.588 147.828,136.144
  rectangle net GND: 144.145,126.746 147.828,132.842
  rectangle net GND: 135.636,121.539 139.954,123.571
  rectangle net GND: 135.636,123.317 147.955,127
  rectangle net GND: 138.303,121.539 147.955,124.968
  rectangle net GND: 139.065,121.539 147.193,124.206
  text "74.041 (mm)" at 92.024,91.583 h2 r89.8
  text "2B E 10" at 110.398,66.64 h2
  text "Saira" at 148.244,66.259 h2
  text "52.073 (mm)" at 113.128,59.864 h2 r358.97

## Text inside footprints (layer, text, board x,y; h text height)
_1: Top Overlay "Block Connector" at 107.061,126.238 h0.51 r90